# Altium PCB Plata_3.PcbDoc
Units mil, origin at the board's own origin, x right, y up, seen from the top; angles counter-clockwise.
Board outline 984.25 x 856.3 mil, 2 copper layers (Top Layer, Bottom Layer), stack 61.756 mil thick; 9 components, 4 nets, 20 pads, 0 vias.
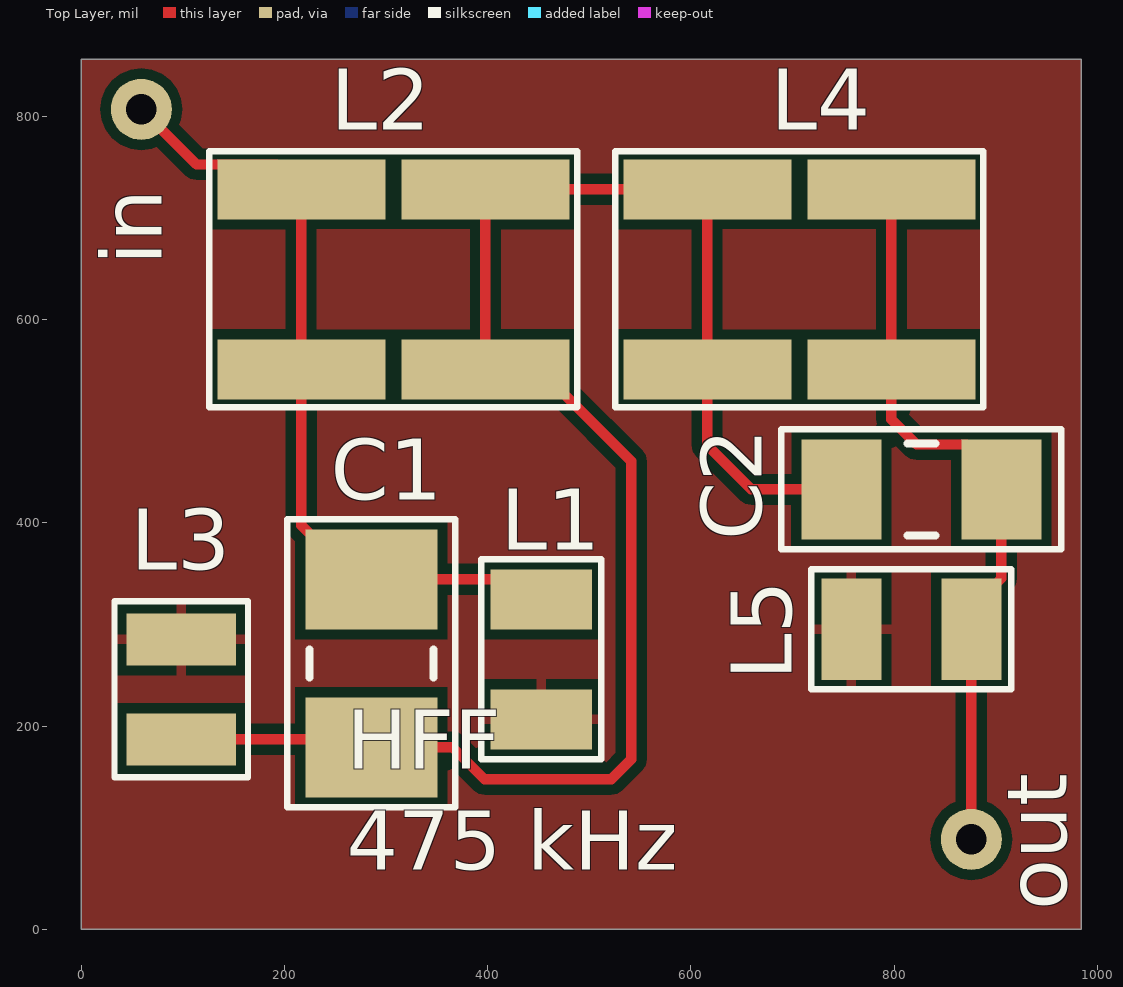
[diagram p0: Top Layer view]
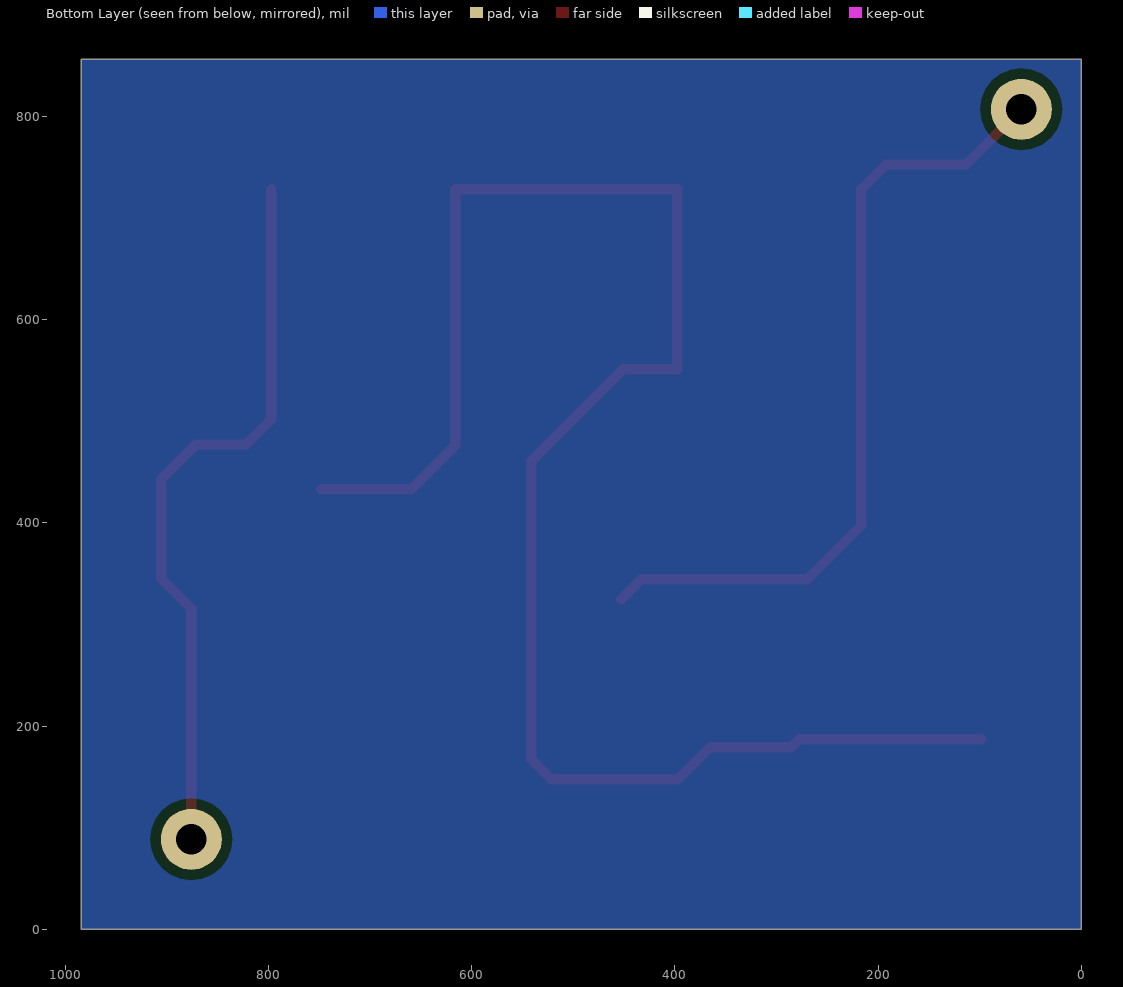
[diagram p1: Bottom Layer view, seen from below]

## Layer stack, top to bottom
Top Solder: solder mask 1, SM-001, Dk 4
Top Layer: signal copper 1.378
Dielectric 1: core 59, Core-043, Dk 4.3
Bottom Layer: signal copper 1.378
Bottom Solder: solder mask 1, SM-001, Dk 4

## Board outline
0,0 984.25,0 984.25,856.3 0,856.3

## Design rules (kind name [scope] priority, off if disabled: settings)
Clearance [All] p1: gap=10 ignorepadtopadclearanceinfootprint=FALSE except(0: Arc-Hole Track-Hole SMDPad-Hole THPad-Hole Via-Hole Fill-Hole Poly-Hole Region-Hole Text-Hole)
PolygonConnect [All] p1: connectstyle=Relief reliefconductorwidth=10 reliefentries=4 polygonreliefangle="90 Angle" airgapwidth=10
RoutingVias [All] p1: holewidth=28 width=50 viastyle="Through Hole" minholewidth=28 minwidth=50 maxholewidth=28 maxwidth=50
SolderMaskExpansion [All] p1: expansion=4 istentingtop=FALSE
Width [All] p1: maxlimit=10 minlimit=10 preferedwidth=10
30 further rules are at their usual default settings.

## Classes and differential pairs
component class Sheet3: in L3 L4 out

## Components (designator, comment, footprint, x,y, rotation, side; value= is the part's Value field where it differs from the comment)
C1 "C1" C1 285.43,261.81 r270 top
C2 "C2" C2 826.77,433.07 r0 top
in "Pin" Pin 59.06,807.09 r90 top (schematic designator Pin1)
L1 "L1,L5" L1,L5 452.76,265.75 r90 top
L2 "L2,L4" L2,L4 307.09,639.76 r270 top
L3 "L3" L3 98.43,236.22 r90 top
L4 "L2,L4" L2,L4 706.69,639.76 r270 top
L5 "L1,L5" L1,L5 816.93,295.28 r0 top
out "Pin" Pin 875.98,88.58 r90 top (schematic designator Pin2)

## Footprints (in the part's own frame and the unit in brackets; to place one, negate y for a bottom-side part, rotate by r counter-clockwise, add the part's x,y. Pads: shape width x height; smd on the part's side, far side on the other; paste and mask are expansions set on the pad)
C1 [mm] "Chip Capacitor, 2-Leads, Body 3,20x2,50mm, IPC Medium Density"
  rect 2.5x3.3 smd: 1(-2.1,0) 2(2.1,0)
  silkscreen extent -3.6,-2.1 3.6,2.1, body extent -1.7,-1.35 1.7,1.35, height 1.5
C2 [mm] "Chip Capacitor, 2-Leads, Body 3,20x1,60mm, IPC Medium Density"
  rect 2x2.5 smd: 1(-2,0) 2(2,0)
  silkscreen extent -3.5,-1.5 3.5,1.5, body extent -1.7,-0.9 1.7,0.9, height 1.5
L1,L5 [mm]
  rect 1.5x2.54 smd: 1(-1.5,0) 2(1.5,0)
  silkscreen extent -2.5,-1.5 2.5,1.5
L2,L4 [mm]
  rect 1.5x4.2 smd: 1(-2.25,-2.3) 2(-2.25,2.3) 3(2.25,-2.3) 4(2.25,2.3)
  silkscreen extent -3.2,-4.6 3.2,4.6
L3 [mm]
  rect 1.3x2.74 smd: 1(1.25,0) 2(-1.25,0)
  silkscreen extent -2.2,-1.67 2.2,1.67
Pin [mil]
  round 60 hole 30: 1(0,0)

## Nets (pads, with @x,y where several pads share a name; then routed paths per layer and width w, separated by ;. In a path a pad name is that pad's centre, name@x,y a point inside that pad or via, vN(x,y) a via of type N, cw(c..) or ccw(c..) an arc to the next point about the centre after c; other vN are vias at no path point)
GND: L1.1 L3.1 L5.1
NetC1_1: C1.1 in.1 L1.2 L2.1 L2.3 | length 787.2
  Top Layer w10: in.1 113.27,752.87 192.01,752.87 L2.1 L2.3 216.54,397.64 269.69,344.49 C1.1 433.07,344.49 L1.2
NetC1_2: C1.2 C2.1 L2.2 L2.4 L3.2 L4.1 L4.3 | length 1739.4
  Top Layer w10: L3.2 277.56,187.01 C1.2 365.39,179.13 396.89,147.64 521.65,147.64 541.34,167.32 541.34,460.63 450.79,551.18 L2.4 L2.2 L4.1 L4.3 616.14,476.38 659.45,433.07 C2.1
NetC2_2: C2.2 L4.2 L4.4 L5.2 out.1 | length 725.7
  Top Layer w10: L4.2 L4.4 797.24,501.97 821.93,477.28 871.14,477.28 905.51,442.91 C2.2 905.51,345.28 875.98,315.75 L5.2 out.1

## Polygon pours and split planes (outlines as drawn)
GND on Top Layer "GND_L01_P000" (solid, pour order 0): 0,856.3 984.25,856.3 984.25,0 0,0
GND on Bottom Layer "GND_L02_P001" (solid, pour order 1): 0,856.3 984.25,856.3 984.25,0 0,0

## Silkscreen, mask and mechanical layers (free items; w line width, h text height)
Top Overlay:
  text "HFF / 475 kHz" at 261.3,39.37 h99.37